# Altium PCB main board 1.PcbDoc
Units mil, origin at the board's own origin, x right, y up, seen from the top; angles counter-clockwise.
Board outline 3335 x 3855 mil, 2 copper layers (Top Layer, Bottom Layer); 28 components, 43 nets, 139 pads, 0 vias.
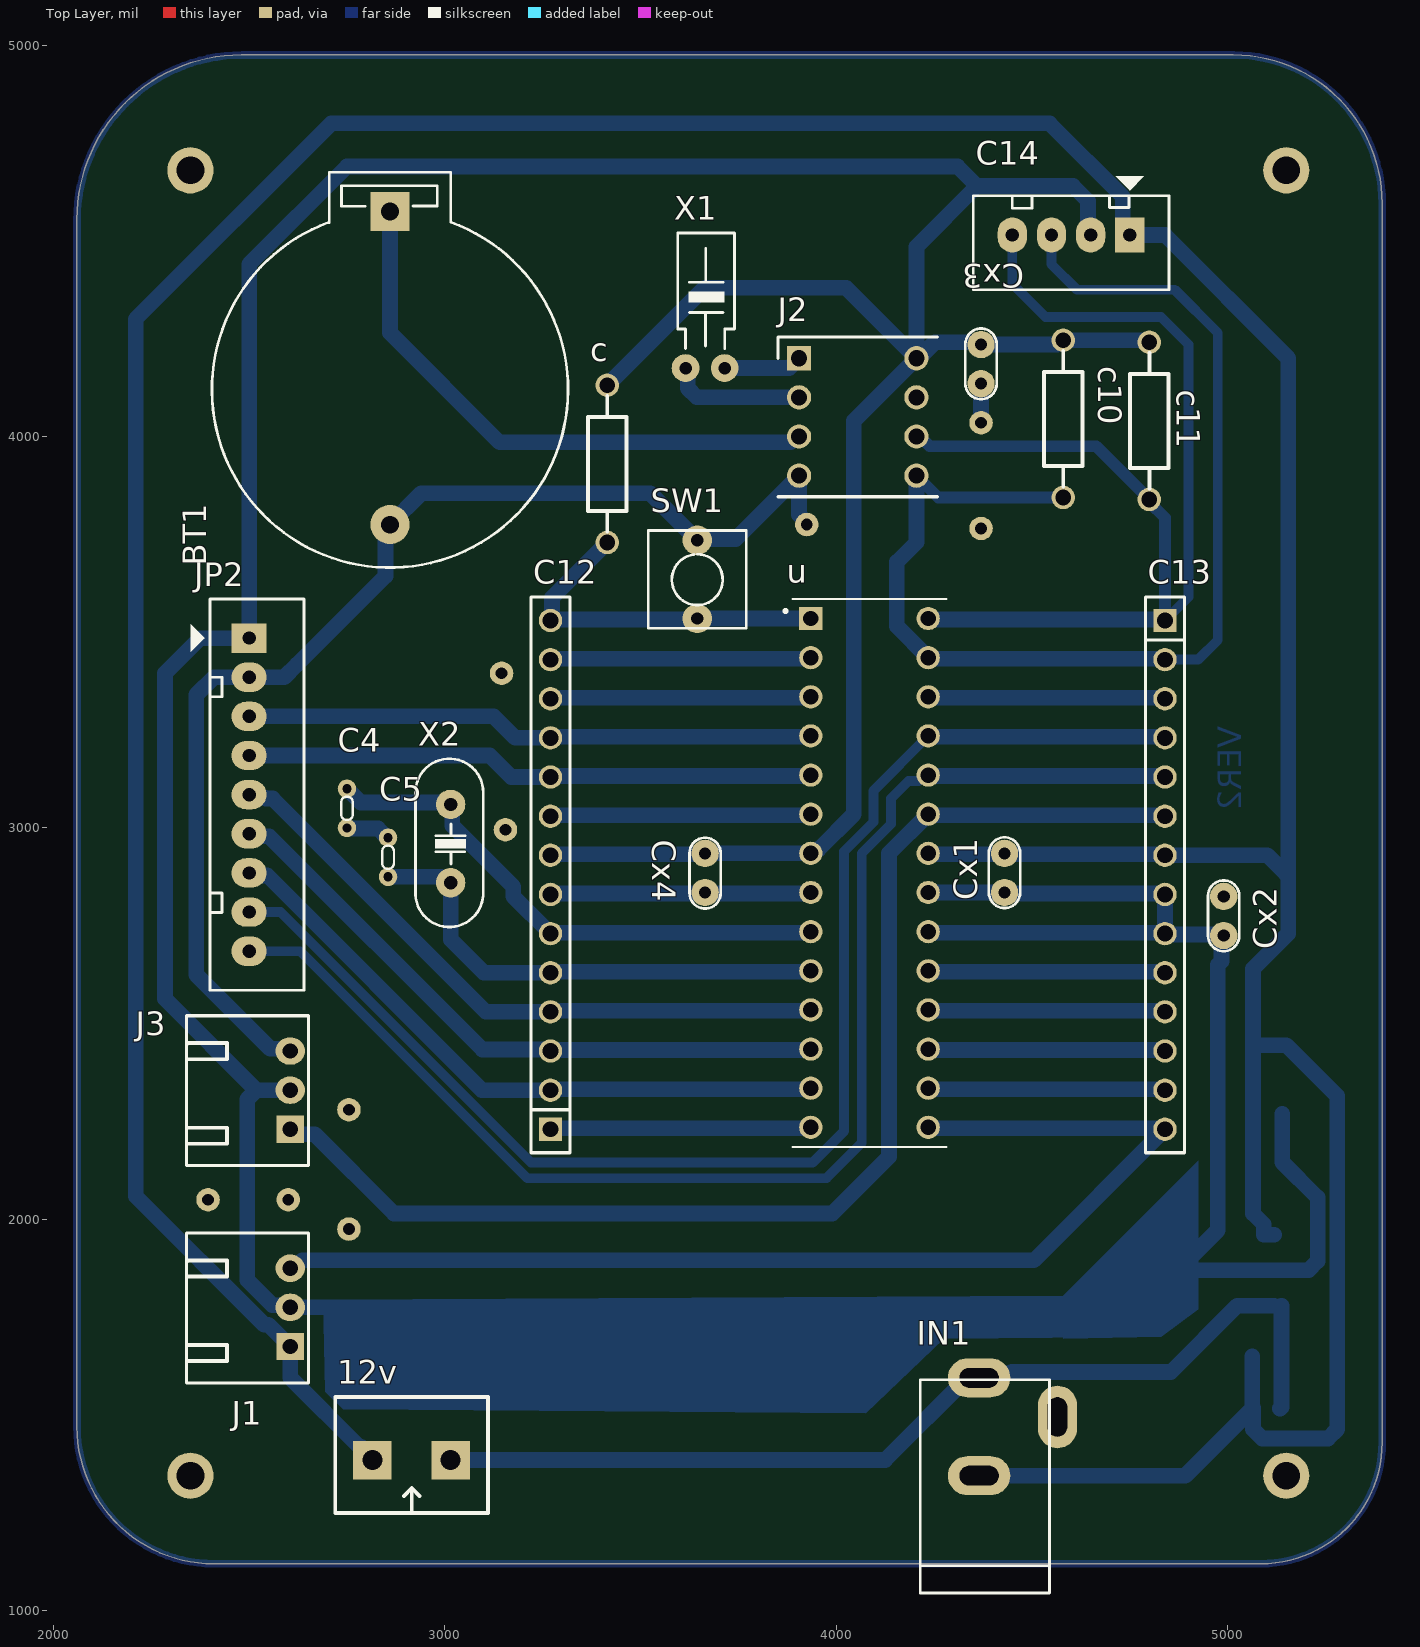
[diagram p0: Top Layer view]
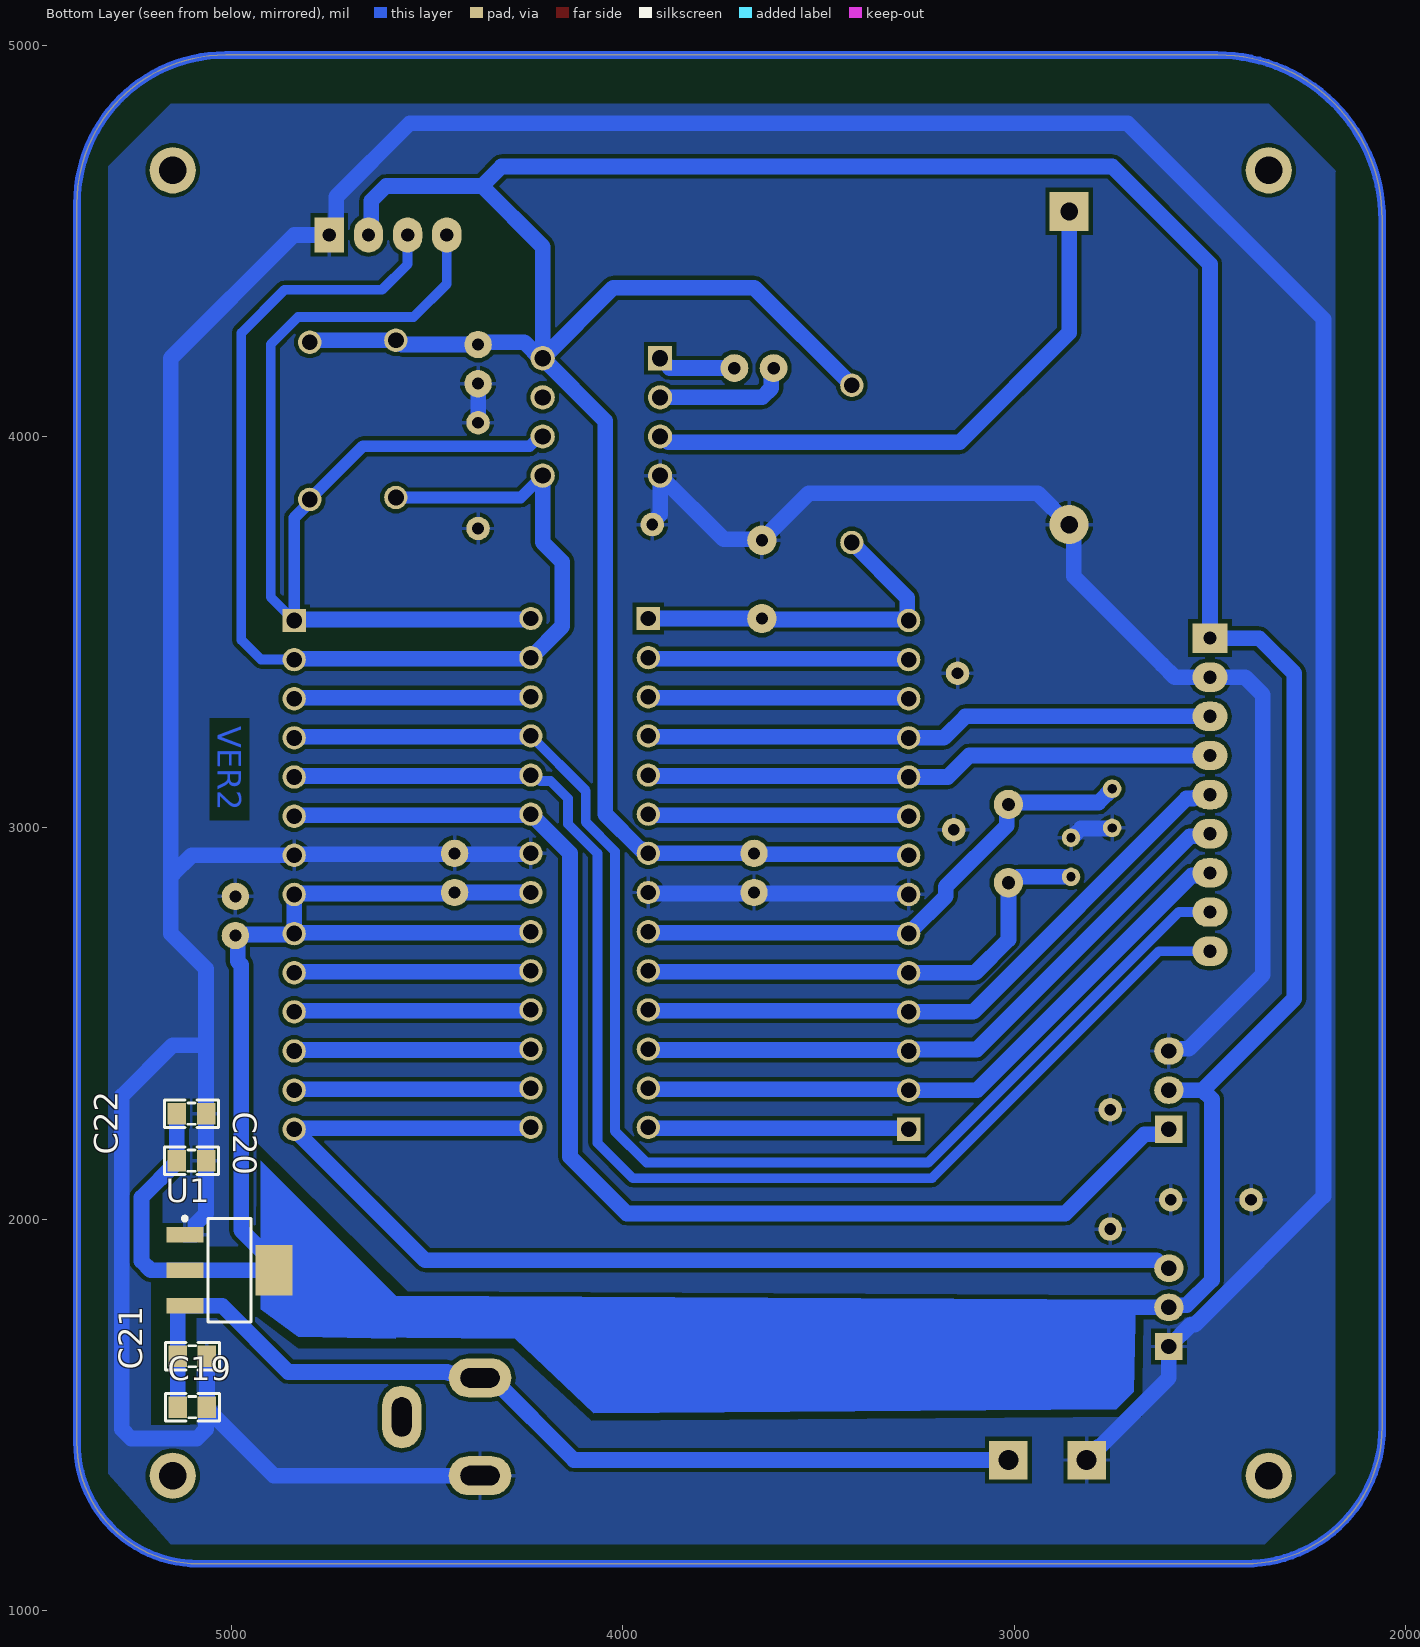
[diagram p1: Bottom Layer view, seen from below]
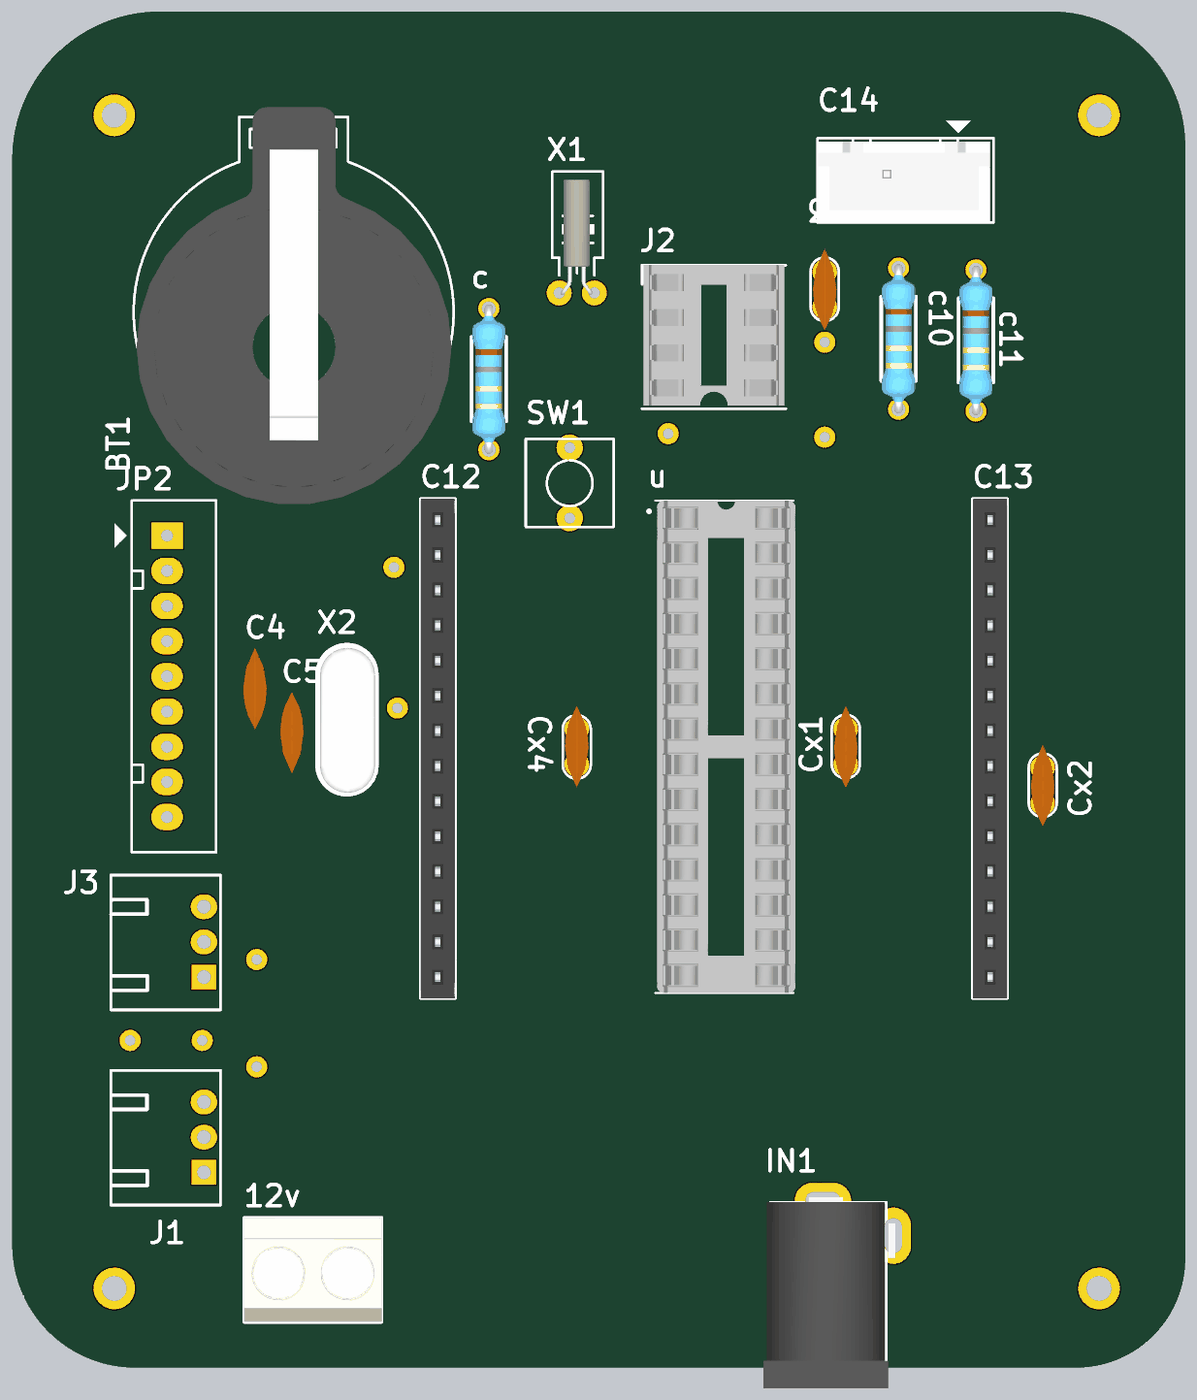
[diagram p2: 3D render of the assembled board from above, using the file's embedded part models]
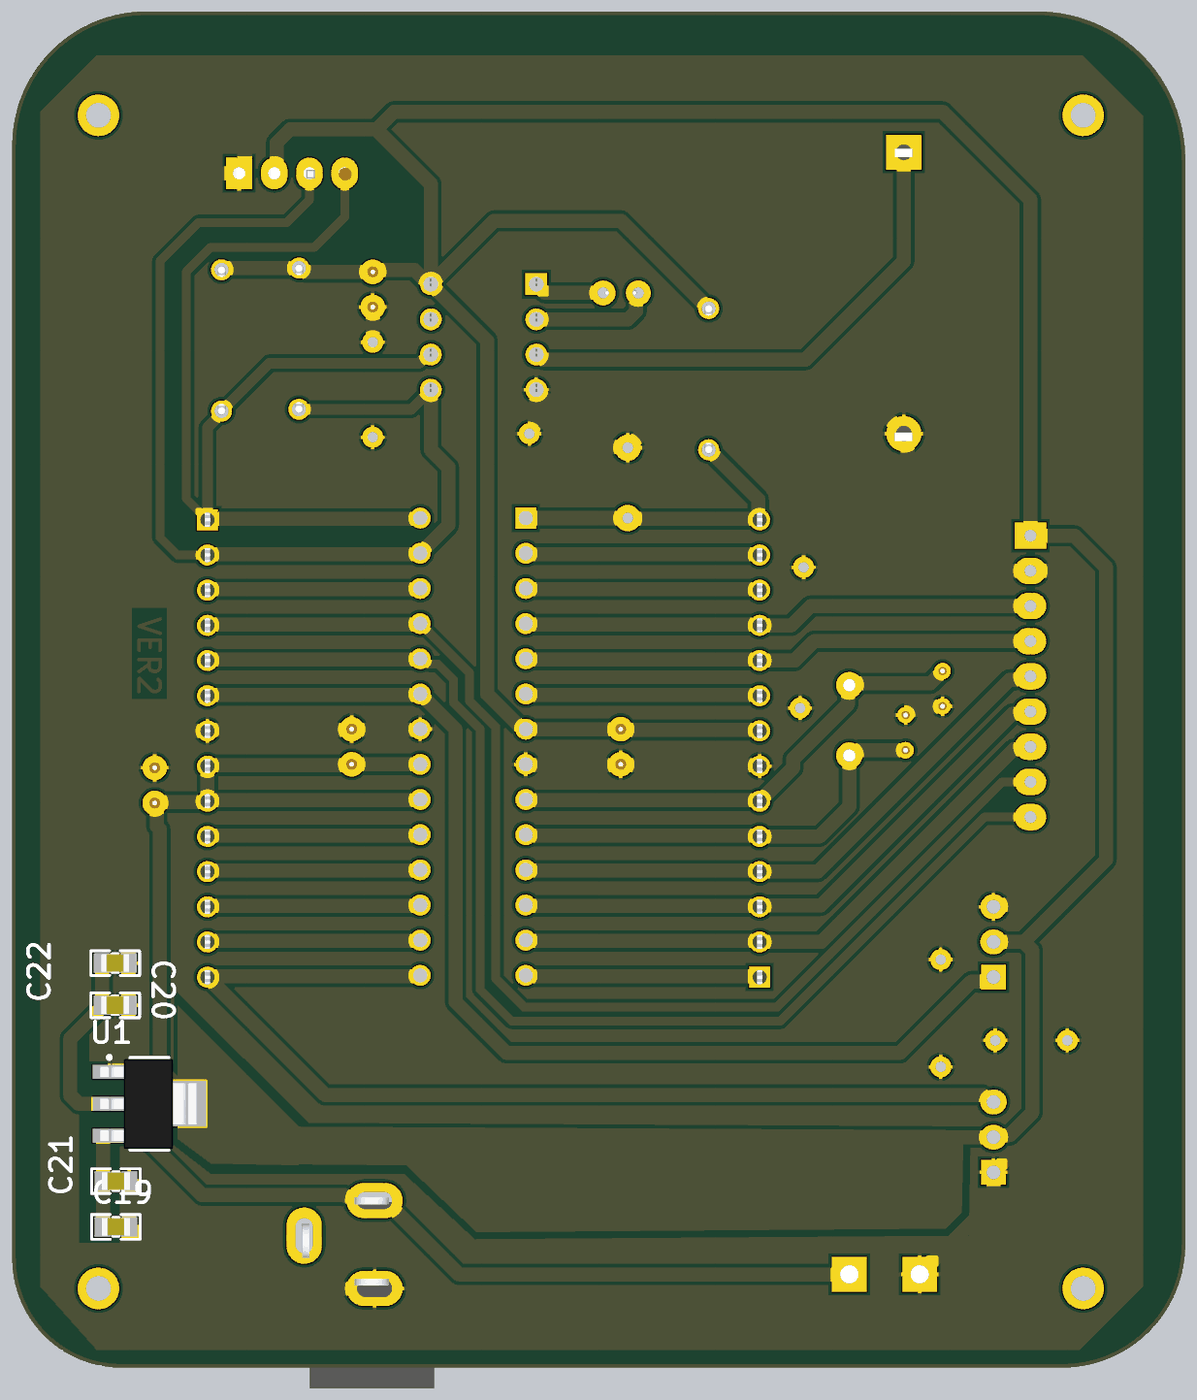
[diagram p3: 3D render of the assembled board from below, using the file's embedded part models]

## Layer stack, top to bottom
Top Solder: solder mask 0.4, Solder Resist, Dk 3.5
Top Layer: signal copper 1.4
Dielectric 1: dielectric 12.6, FR-4, Dk 4.8
Bottom Layer: signal copper 1.4
Bottom Solder: solder mask 0.4, Solder Resist, Dk 3.5

## Board outline
2060,1470 ccw(c2410,1470) 2410,1120 5085,1120 ccw(c5085,1430) 5395,1430 5395,4595 ccw(c5015,4595) 5015,4975 2480,4975 ccw(c2480,4555) 2060,4555

## Design rules (kind name [scope] priority, off if disabled: settings)
Clearance [All] p1: gap=10 ignorepadtopadclearanceinfootprint=FALSE except(0: Arc-Hole Track-Hole SMDPad-Hole THPad-Hole Via-Hole Fill-Hole Poly-Hole Region-Hole Text-Hole)
PolygonConnect [All] p1: connectstyle=Relief reliefconductorwidth=10 reliefentries=4 polygonreliefangle="90 Angle" airgapwidth=10
RoutingVias [All] p1: holewidth=28 width=50 viastyle="Through Hole" minholewidth=28 minwidth=50 maxholewidth=28 maxwidth=50
SolderMaskExpansion [All] p1: expansion=4 istentingtop=FALSE
Width [All] p1: maxlimit=40 minlimit=20 preferedwidth=25
30 further rules are at their usual default settings.

## Components (designator, comment, footprint, x,y, rotation, side; value= is the part's Value field where it differs from the comment)
12v "KF2" KF2-5.08 2915,1385 r180 top
BT1 "PIN 3V" PIN3V 2860,4575 r270 top
c "100K" "tro vach 1/4w" 3415,3930 r90 top
C4 "MH" Tu-pico 2750,3100 r270 top value=33p
C5 "MH" Tu-pico 2855,2875 r90 top value=33p
c10 "4,7K" "tro vach 1/4w" 4580,4045 r90 top
c11 "4,7K" "tro vach 1/4w" 4800,4040 r90 top
C12 "JP14" JP14-C1T 3270,2230 r90 top
C13 "JP14" JP14-C1T 4840,3530 r270 top
C14 "Header4" Header4 4750,4515 r180 top
C19 "104" "Tu 0805" 5100,1520 r0 bottom
C20 "104" "Tu 0805" 5102.23,2269.87 r0 bottom
C21 "106" "Tu 0805" 5100,1650 r0 bottom
C22 "106" "Tu 0805" 5102.23,2149.87 r0 bottom
Cx1 "104" CN1 4430,2885 r90 top value=33pF
Cx2 "104" CN1 4990,2775 r90 top value=33pF
Cx3 "104" CN1 4370,4185 r90 top value=33pF
Cx4 "104" CN1 3665,2885 r270 top value=33pF (schematic designator Cx2)
IN1 "Jac DC" DC0 4465,1470 r90 top
J1 "relay" "Header_Duc Cong_3P 2.54" 2605,1675 r270 top
J2 "A_08-LC-TT" DIPS762W61P254L1016H525Q8N 3905,4200 r0 top
J3 "sensor header" "Header_Duc Cong_3P 2.54" 2605,2230 r270 top
JP2 "JP9" Header9 2500,3485 r270 top value="Connector 9"
SW1 "" SW2 3645,3535 r90 top
u "1-2199298-9" DIP762W60P254L3556H510Q28 4085,2885 r0 top
U1 "ASM1117-5V" SOT223 5005,1870 r270 bottom
X1 "32k" XT32k 3615,4175 r90 top value=4Mhz
X2 "16Mhz" XT2 3015,2960 r90 top value=4Mhz

## Footprints (in the part's own frame and the unit in brackets; to place one, negate y for a bottom-side part, rotate by r counter-clockwise, add the part's x,y. Pads: shape width x height; smd on the part's side, far side on the other; paste and mask are expansions set on the pad)
CN1 [mil]
  round 70 hole 31: 1(-50,0) 2(50,0)
  silkscreen extent -90,-40 91,40, body extent -115,-33 115,33, height 265
DC0 [mil] "Jac DC input"
  oval 100x160 hole 50 slot 100 at 90 deg: 1(125,100) 2(-125,100)
  oval 160x100 hole 50 slot 100 at 0 deg: 3(25,-100)
  silkscreen extent -425,-80 120,250, body extent -410,-105 134,269, height 434
DIP762W60P254L3556H510Q28 [mm]
  rect 1.508x1.508 hole 1: 1(-3.81,16.51)
  round 1.508 hole 1: 2(-3.81,13.97) 3(-3.81,11.43) 4(-3.81,8.89) 5(-3.81,6.35) 6(-3.81,3.81) 7(-3.81,1.27) 8(-3.81,-1.27) 9(-3.81,-3.81) 10(-3.81,-6.35) 11(-3.81,-8.89) 12(-3.81,-11.43) 13(-3.81,-13.97) 14(-3.81,-16.51) 15(3.81,-16.51) 16(3.81,-13.97) 17(3.81,-11.43) 18(3.81,-8.89) 19(3.81,-6.35) 20(3.81,-3.81) 21(3.81,-1.27) 22(3.81,1.27) 23(3.81,3.81) 24(3.81,6.35) 25(3.81,8.89) 26(3.81,11.43) 27(3.81,13.97) 28(3.81,16.51)
  silkscreen extent -5.55,-17.78 5,17.78, body extent -4.87,-17.78 5.13,17.78, height 5
DIPS762W61P254L1016H525Q8N [mm]
  rect 1.575x1.575 hole 1.05: 1(0,0)
  round 1.575 hole 1.05: 2(0,-2.54) 3(0,-5.08) 4(0,-7.62) 5(7.62,-7.62) 6(7.62,-5.08) 7(7.62,-2.54) 8(7.62,0)
  silkscreen extent -1.37,-8.99 8.99,1.37, body extent -1.27,-8.76 8.89,1.4, height 4.81
Header4 [mil] "CON4"
  rect 75x90 hole 34: 1(0,0)
  oval 75x90 hole 34: 2(100,0) 3(200,0) 4(300,0)
  silkscreen extent -100,-150 400,140, body extent -90,-90 398,136, height 276
Header9 [mil] "CON9"
  rect 75x90 hole 34: 1(0,0)
  oval 75x90 hole 34: 2(100,0) 3(200,0) 4(300,0) 5(400,0) 6(500,0) 7(600,0) 8(700,0) 9(800,0)
  silkscreen extent -100,-150 900,140
"Header_Duc Cong_3P 2.54" [mil]
  rect 70x70 hole 39.37 unplated: 1(0,0)
  oval 70x75 hole 39.37 unplated: 2(-100,0) 3(-200,0)
  silkscreen extent -290,-265 93,47
JP14-C1T [mm] "14 row, straight, gold plating"
  rect 1.52x1.52 hole 1.02: 1(0,0)
  round 1.52 hole 1.02: 2(2.54,0) 3(5.08,0) 4(7.62,0) 5(10.16,0) 6(12.7,0) 7(15.24,0) 8(17.78,0) 9(20.32,0) 10(22.86,0) 11(25.4,0) 12(27.94,0) 13(30.48,0) 14(33.02,0)
  silkscreen extent -1.52,-1.27 34.54,1.27, body extent -1.52,-1.25 34.54,1.25, height 8.51
KF2-5.08 [mm]
  rect 2.5x2.5 hole 1.3: 1(-2.54,0) 2(2.54,0)
  silkscreen extent -4.95,-4.08 4.95,3.43, body extent -5,-4.07 5,3.43, height 10
PIN3V [mil] "Socket PIN 3V"
  rect 100x100 hole 45: 1(0,0)
  round 100 hole 45: 2(800,0)
  silkscreen extent -100,-455 910,455, body extent -128,-447 1002,449, height 278
SOT223 [mm]
  rect 1x2.4 smd: 1(-2.3,-2.9) 2(0,-2.9) 3(2.3,-2.9)
  rect 3.3x2.4 smd: 4(0,2.9)
  silkscreen extent -3.47,-3.03 3.35,1.4, body extent -3.25,-3.56 3.25,3.4, height 1.68
SW2 [mil] "SW button 2pin, 250x 250 mil"
  round 75 hole 31: 1(0,0) 2(200,0)
  silkscreen extent -25,-125 225,125
"tro vach 1/4w" [mm]
  round 1.52 hole 1.02: 1(-5.1,0) 2(5.1,0)
  silkscreen extent -4.39,-1.25 4.42,1.25, body extent -5.38,-1.2 5.38,1.2, height 2.41
"Tu 0805" [mm] "Compoment SMD 80x50mil"
  rect 1.2x1.4 smd: 1(-0.946,-0.003) 2(0.954,-0.003)
  silkscreen extent -1.75,-0.89 1.75,0.89, body extent -1.01,-0.64 1.01,0.63, height 0.61
Tu-pico [mm] "Tu gom mini"
  round 1.2 hole 0.6: 1(0,0) 2(2.54,0)
  silkscreen extent 0.51,-0.38 2.03,0.38, body extent -1.65,-0.85 4.19,0.85, height 6.12
XT2 [mil] "Footpin for Crystal 2 pin"
  round 75 hole 34: 1(-100,0) 2(100,0)
  silkscreen extent -213,-83 217,90, body extent -216,-87 216,90, height 144
XT32k [mm]
  round 1.8 hole 0.813: 1(0,0) 2(0,-2.54)
  silkscreen extent 1.27,-3.17 8.76,0.51, body extent -0.15,-2.42 8.2,-0.12, height 1.95

## Part data
12v: Manufacturer="Würth Elektronik eiSos GmbH", partNo=691103110002, ComponentLink1 Description=Manufacturer, ComponentLink1URL=http://www.we-online.com, ComponentLink2 Description=Datasheet, ComponentLink2URL=http://katalog.we-online.de/em/datasheet/6911031100xx.pdf, Created by="Karrer Zheng", Created Date="29 October 2013", NoPins=2
BT1: "Battery 3VDC"
c c10 c11: library part "Tro Vach 1/4W 5% 10k", "Căm", Chung_Loai=Cắm, Don_Vi=Con, Ma_Hang=MH007354, So_Chan=2, Ten_Linh_Kien="Trở Vạch 1/4w 5% 10K"
C4 C5: library part "Tu 33pF", "Cắm"
C12 C13: "WR-PHD 2.54 mm Angled Socket Header", Manufacturer="W¨¹rth Elektronik eiSos GmbH", partNo=613014143121, ComponentLink1 Description=Manufacturer, ComponentLink1URL=http://www.we-online.com, ComponentLink2 Description=Datasheet, ComponentLink2URL=http://katalog.we-online.de/em/datasheet/6130xx143121.pdf, Created by="Karrer Zheng", Created Date="29 March 2013", NoPins=14
C14: "Header IDC, 4 x 1 Pin Vertical 2.54mm Pitch (Non-Boxed, Male)", Manufacturer="W¨¹rth Elektronik eiSos GmbH", partNo=613002143121, ComponentLink1 Description=Manufacturer, ComponentLink1URL=http://www.we-online.com, ComponentLink2 Description=Datasheet, ComponentLink2URL=http://katalog.we-online.de/em/datasheet/6130xx143121.pdf, Created by="Karrer Zheng", Created Date="29 March 2013", NoPins=02
C19 C20: library part "Tu 104", "Dán", Chung_Loai=Dán, Don_Vi=Con, Ma_Hang=MH004551, Ten_Linh_Kien="Tụ 0805 104-100nF 10% 50V"
C21 C22: library part "Tu 106", "Dán", Chung_Loai=Dán, Don_Vi=Con, Ma_Hang=MH004553, Ten_Linh_Kien="Tụ 0805 106-10uF 10% 16V"
Cx1 Cx2 Cx3 Cx4: library part CN0, "Cremic For Xtal 1pF => 100pF"
IN1: library part DCIN, "Jac DC input"
J1 J3: library part "Header 1_2.54_3P", "Cắm", Chung_Loai=Cắm
J2: "8 (2 x 4) Pos DIP, 0.3 (7.62mm) Row Spacing Socket Tin Through Hole", Package=None, Availability=Unavailable, MF="Assmann WSW Components", MP="A 08-LC-TT", Price=None, SnapEDA_Link=https://www.snapeda.com/parts/A%2008-LC-TT/Assmann%20WSW%20Components/view-part/3092960/?ref=snap
JP2: library part Header9, "Connector 9"
SW1: library part "Nut Nhan 2 Chan ( Dip )", "Cắm", Chung_Loai=Cắm, Don_Vi=Con, Ma_Hang=MH001959, Ten_Linh_Kien="Nút Nhấn 2 Chân 6x6x5MM DIP"
u: "28P,DIP SKT,300 CL,LDR,PB FREE", Package="PDIP-28 TE Connectivity", Centerline_Pitch="2.54 mm[.1 in]", ComponentLink1Description="New link", Digi-Key_Part_Number=A120353-ND, EU_RoHS_Compliance=Compliant, MF="TE Connectivity", MP=1-2199298-9, Number_of_Positions=28, Product_Type=Socket, SnapEDA_Link=https://www.snapeda.com/parts/1-2199298-9/TE%20Connectivity%20AMP%20Connectors/view-part/1265789/?ref=snap
U1: library part LM1117, "800mA Low-Dropout Linear Regulator", Creator="Nguyen Ba Bien", Website=http://group3i.net
X1 X2: library part XT2, "Crystal, 32.768 KHz, -40 to 85 degC, 3.2 x 1.5 x 0.9 mm SMD"

## Free pads (board coordinates)
  round 60 hole 30: 9(2395,2050) 9(2600,2050) 9(2755,1975) 9(2755,2280) 9(3145,3395) 9(3155,2995) 9(3925,3775) 9(4370,3765) 9(4370,4035)
  round 118.11 hole 70.87: 14(2350,1345) 14(2350,4680) 14(5150,1345) 14(5150,4680)

## Nets (pads, with @x,y where several pads share a name; then routed paths per layer and width w, separated by ;. In a path a pad name is that pad's centre, name@x,y a point inside that pad or via, vN(x,y) a via of type N, cw(c..) or ccw(c..) an arc to the next point about the centre after c; other vN are vias at no path point)
Net12v_1: 12v.1 C19.2 C21.2 IN1.1 U1.3 | length 2582.1
  Bottom Layer w40: 12v.1 4125,1385 IN1.1@4335,1595 ; IN1.1@4318.76,1595 IN1.1@4335,1595 ; IN1.1@4335,1603.95 4356.05,1603.95 IN1.1 ; U1.3 5024.45,1779.45 4855,1610 4448.43,1610 4444.91,1606.48 4376.48,1606.48 IN1.1 ; C19.2@5133.95,1516.51 C19.2 C21.2 5137.57,1779.13 U1.3@5137.26,1779.45 ; IN1.1@4335,1595 IN1.1
Net12v_2: 12v.2 BT1.2 C4.2 C5.2 C12.7 C13.7 C14.1 C19.1 C20.1 C21.1 C22.1 Cx1.2 Cx2.2 Cx3.1 Cx4.2 IN1.2 J1.1 J2.4 J3.3 JP2.2 pad.9 SW1.2 U1.1 u.8 u.22 | length 16190.5
  Bottom Layer w40: J3.3 2599.26,2435.74 2554.26,2435.74 2365,2625 2365,3340 2410,3385 JP2.2 2590,3385 2622.5,3417.5 2848.52,3643.52 2848.52,3763.52 BT1.2 2940,3855 3525,3855 SW1.2 3647.5,3737.5 3742.5,3737.5 J2.4 3905,3800.41 3925,3780.41 pad.9@3925,3775 ; C4.2 2751.39,2998.61 2829.43,2998.61 2853.04,2975 C5.2 ; 12v.2@2785.79,1419.21 12v.2@2785.79,1414.21 ; 12v.2 12v.2@2785.79,1414.21 ; C12.7 3272.5,2832.5 3932.5,2832.5 u.8 ; u.22 4237.5,2932.5 4430,2932.5 4837.5,2932.5 C13.7 5101.57,2930 5149.26,2882.31 ; IN1.2 4891.57,1345 5062.77,1516.2 C19.1 ; pad.9@4370,4035 Cx3.1 ; C21.1 C19.1 ; U1.1 5092.24,1960.55 5091.93,1960.87 5091.93,1987.8 5065,2014.72 C22.1 C20.1 5065,2445 ; 12v.2@2785.79,1414.21 2605,1595 J1.1 2549.26,1730.74 2538.55,1730.74 2210,2059.29 2210,4300 2710,4800 4545,4800 4732.5,4612.5 4732.5,4532.5 C14.1 4840,4515 5155,4200 5155,2882.31 5155,2830 5155,2730 5065,2640 5065,2445 ; C19.1 5065,1517.91 5060,1512.91 5064.67,1512.91 5065,1512.57 5065,1463.43 5088.43,1440 5256.57,1440 5280,1463.43 5280,2315 5150,2445 5065,2445
NetBT1_1: BT1.1 J2.3 | length 1477.2
  Bottom Layer w40: BT1.1 2860,4265 3140,3985 3884.04,3985 3899.04,4000 J2.3
NetC3_1: C12.1 u.14 | length 667.1
  Bottom Layer w40: C12.1 3272.5,2232.5 3932.5,2232.5 u.14
NetC3_2: C12.2 JP2.7 u.13 | length 1667
  Bottom Layer w40: JP2.7 2506.7,2878.3 2546.7,2878.3 3095,2330 C12.2 3272.5,2332.5 3932.5,2332.5 u.13
NetC3_3: C12.3 JP2.6 u.12 | length 1667
  Bottom Layer w40: JP2.6 2506.7,2978.3 2551.7,2978.3 3096.2,2433.8 3266.2,2433.8 C12.3 3272.5,2432.5 3932.5,2432.5 u.12
NetC3_4: C12.4 JP2.5 u.11 | length 1667
  Bottom Layer w40: JP2.5 2506.7,3078.3 2538.95,3078.3 2542.25,3075 2560,3075 3105,2530 C12.4 3272.5,2532.5 3932.5,2532.5 u.11
NetC3_5: C5.1 C12.5 u.10 X2.1 | length 1268.5
  Bottom Layer w40: C5.1 2990.53,2875 3005.53,2860 X2.1 3015,2715 3100,2630 C12.5 3272.5,2632.5 3932.5,2632.5 u.10
NetC3_6: C4.1 C12.6 u.9 X2.2 | length 1384.3
  Bottom Layer w40: C4.1 2785,3065 3010,3065 3018.94,3056.06 3018.94,3006.06 3175,2850 3175,2825 C12.6 3272.5,2732.5 3932.5,2732.5 u.9
NetC3_8: c10.2 c11.2 C12.8 C13.8 C13.9 C14.2 C20.2 C22.2 c.2 Cx1.1 Cx2.1 Cx3.2 Cx4.1 J1.2 J2.8 J3.2 JP2.1 U1.2 U1.4 u.7 u.20 u.21 | length 15078.4
  Bottom Layer w40: J3.2 2518.43,2330 ; C12.8 3272.5,2932.5 3662.5,2932.5 Cx4.1 u.7 3940.24,2935 3949.93,2944.69 3954.69,2944.69 4045,3035 4045,4040 J2.8 ; c.2 3664.21,4380 4025,4380 J2.8 ; u.20 4237.5,2732.5 4837.5,2732.5 C13.9 ; u.21@4237.5,2832.5 u.21 Cx1.1 4432.5,2832.5 4837.5,2832.5 C13.8 C13.9 ; C14.2@4656.7,4508.3 C14.2 4643.3,4521.7 4643.3,4601.7 4605,4640 4360,4640 ; c11.2 4795.91,4240.79 4790.91,4245.79 c10.2 4575.91,4245.79 4565.12,4235 Cx3.2 4364.26,4240.74 4251.7,4240.74 4210.96,4200 J2.8 ; C20.2 C22.2 5139.8,2146.06 5230,2055.87 5230,1893.43 5206.57,1870 U1.4 ; 2518.43,2330 2285,2563.43 2285,3395 2375,3485 JP2.1 2500,4440 2750,4690 4310,4690 4360,4640 ; 2518.43,2330 2495,2306.57 2495,1845 2559.26,1780.74 2599.26,1780.74 J1.2 4813.54,1775 4890.83,1852.28 U1.4 ; J2.8 4205,4485 4360,4640 ; C13.9 4842.5,2727.5 4987.5,2727.5 Cx2.1 4984.26,2719.26 4984.26,2659.26 4975,2650 4975,1971.89 4890.83,1887.72 U1.4
NetC3_9: C12.9 u.6 | length 667.1
  Bottom Layer w40: C12.9 3272.5,3032.5 3932.5,3032.5 u.6
NetC3_10: C12.10 JP2.4 u.5 | length 1459.9
  Bottom Layer w40: JP2.4 3115,3185 3170,3130 C12.10 3272.5,3132.5 3932.5,3132.5 u.5
NetC3_11: C12.11 JP2.3 u.4 | length 1459.9
  Bottom Layer w40: JP2.3 3125,3285 3180,3230 C12.11 3272.5,3232.5 3932.5,3232.5 u.4
NetC3_12: C12.12 u.3 | length 667.1
  Bottom Layer w40: C12.12 3272.5,3332.5 3932.5,3332.5 u.3
NetC3_13: C12.13 u.2 | length 667.1
  Bottom Layer w40: C12.13 3272.5,3432.5 3932.5,3432.5 u.2
NetC3_14: C12.14 c.1 SW1.1 u.1 | length 922.8
  Bottom Layer w40: C12.14 C12.14@3272.5,3532.5 ; c.1 3273.8,3588.01 3273.8,3533.8 C12.14@3272.5,3532.5 ; u.1 SW1.1 3642.5,3532.5 C12.14@3272.5,3532.5
Netc8_1: 
NetC9_1: c11.1 C13.1 C14.4 J2.6 u.28 | length 2963.5
  Bottom Layer w25: C14.4 4450,4390 4535,4305 4830,4305 4900,4235 4900,3590 C13.1
  Bottom Layer w30: J2.6 4213.58,4000 4238.58,3975 4664.21,3975 c11.1 4800,3832.42 4840,3792.42 C13.1
  Bottom Layer w40: u.28 4237.5,3532.5 4837.5,3532.5 C13.1
NetC9_2: c10.1 C13.2 C14.3 J2.5 u.27 | length 3037.2
  Bottom Layer w25: C14.3 4550,4440 4615,4375 4865,4375 4975,4265 4975,3480 4925,3430 C13.2
  Bottom Layer w30: J2.5 4260.79,3844.21 c10.1
  Bottom Layer w40: J2.5 4205,3729.52 4155,3679.52 4155,3515 u.27 4237.5,3432.5 4837.5,3432.5 C13.2
NetC9_3: C13.3 u.26 | length 607.1
  Bottom Layer w40: u.26 4237.5,3332.5 4837.5,3332.5 C13.3
NetC9_4: C13.4 JP2.8 u.25 | length 3524.4
  Bottom Layer w25: JP2.8 2579.9,2785 3219.9,2145 3940,2145 4020,2225 4020,2940 4095,3015 4095,3095 u.25
  Bottom Layer w40: u.25 4237.5,3232.5 4837.5,3232.5 C13.4
NetC9_5: C13.5 JP2.9 u.24 | length 3480.5
  Bottom Layer w25: JP2.9 2630.4,2685 3210.4,2105 3975,2105 4065,2195 4065,2935 4140,3010 4140,3075 4184.99,3119.99 4210.69,3119.99 4225.7,3135 u.24
  Bottom Layer w40: u.24 4237.5,3132.5 4837.5,3132.5 C13.5
NetC9_6: C13.6 J3.1 u.23 | length 3202.6
  Bottom Layer w40: J3.1 2617.43,2217.57 2667.43,2217.57 2870,2015 3990,2015 4135,2160 4135,2935 u.23 4237.5,3032.5 4837.5,3032.5 C13.6
NetC9_10: C13.10 u.19 | length 607.1
  Bottom Layer w40: u.19 4237.5,2632.5 4837.5,2632.5 C13.10
NetC9_11: C13.11 u.18 | length 607.1
  Bottom Layer w40: u.18 4237.5,2532.5 4837.5,2532.5 C13.11
NetC9_12: C13.12 u.17 | length 607.1
  Bottom Layer w40: u.17 4237.5,2432.5 4837.5,2432.5 C13.12
NetC9_13: C13.13 u.16 | length 607.1
  Bottom Layer w40: u.16 4237.5,2332.5 4837.5,2332.5 C13.13
NetC9_14: C13.14 J1.3 u.15 | length 2989.1
  Bottom Layer w40: J1.3 2615.62,1875 2635.62,1895 4505,1895 C13.14 4837.5,2232.5 4237.5,2232.5 u.15
NetC15_1: 
NetC15_2: 
NetC16_2: 
NetC17_2: 
NetC18_2: 
NetJ2_1: J2.1 X1.2 | length 200.4
  Bottom Layer w40: X1.2 3880,4175 J2.1
NetJ2_2: J2.2 X1.1 | length 347.8
  Bottom Layer w40: X1.1 3620.91,4169.09 3620.91,4123.43 3644.34,4100 J2.2
NetJP1_1: 
NetJP1_2: 
NetJP1_3: 
NetJP1_9: 
NetLED2_1: 
NetLED3_1: 
NetLED4_1: 
NetLED5_1: 
pads on no net: IN1.3 J2.7
copper on no net: | length 13752
  Bottom Layer w19.68: 2060,1470 ccw(c2410,1470) 2410,1120 5085,1120 ccw(c5085,1430) 5395,1430 5395,4595 ccw(c5015,4595) 5015,4975 4381.25,4975 3113.75,4975 2483.1,4975 ccw(c2483.1,4551.9) 2060,4551.9 2060,1470

## Polygon pours and split planes (outlines as drawn)
Net12v_2 on Bottom Layer "gnd1" (solid, remove dead copper, pour order 0): 2175,4680 2180,4675 2180,1350 2360,1170 5155,1170 5315,1350 5315,1360 5315,4690 5155,4850 2350,4850 2180,4680

## Other copper
Bottom Layer:
  pour cut-out: 5105,1475 5110,1480 5205,1480 5205,1475 5106.99,1475 5106.99,1482.57 5205,1482.57 5205,1480
  pour cut-out: 5090,1750 5090,1475 5105,1475 5106.99,1476.99 5106.99,1748.86 5096.14,1748.86 5095,1750
  pour cut-out: 5175,1839.41 5175,1751.18 5176.42,1749.76 5176.65,1750 5205,1750 5205,1837.84 5206.57,1839.41
  pour cut-out: 5168.16,1749.76 5168.16,1485.61 5173.77,1480 5205,1480 5205,1750 5204.76,1749.76
  pour cut-out: 5190.83,2044.17 5192.48,2045.81 5196.26,2045.81 5196.26,2048.74 5176.42,2068.58 5176.42,2058.58
  pour cut-out: 5200,2035 5200,1930 5181.06,1930 5176.42,1934.64 5176.42,2058.58
  pour cut-out: 4954.03,1900.59 5193.9,1900.59 5200,1906.69 5200,1930 4980,1930 4955.59,1905.59 4951.96,1905.59
  pour cut-out: 4948.07,1839.41 4948.07,1795.04 4943.05,1795.04 4939.53,1791.53 4939.53,1755.47 4940,1755 4940,1735 4940.04,1735 5015.07,1810.04 5175.51,1810.04 5175,1810.55 5175,1840 4948.66,1840
  region net NetC3_8: 4925,2150 4580,1805 4580,1695 4830,1700 4925,1770
  region net NetC3_8: 2690,1795 2695,1560 2740,1515 4075,1505 4275,1695 4830,1700 4925,1770 4925,2150 4740,1930 4705,1905 4675,1870 4650,1855 4620,1830 4580,1805 2680,1795
  pour cut-out net NetC3_8: 2670,1790 2675,1495 4080,1485 4280,1670 4830,1670 4940,1755 4935,2145 4935,2195 4530,1795
  text "VER2" at 5035,3260 h60 r90